# EAGLE board CT_schematic (EAGLE 7.6.0)

Size 100 x 80 mm. Coordinates in mm from the lower left corner, seen from the top.
Outline: 0,0 100,0 100,80 0,80 0,0
Copper layers (1*16): Top 0.035mm / dielectric 1.5mm / Bottom 0.035mm
Design rules "default": minimum track width 10mil, minimum drill 24mil, track to track 8mil, track to pad 8mil, pad to pad 8mil, via to via 8mil, smd to smd 8mil, copper to edge 40mil, drill to drill 8mil, minimum pad ring 10mil, minimum via ring 8mil, stop-mask expansion 4mil, vias tented up to drill 0mil, thermal gap 10mil

## Footprints (pad centres in the part's own frame; a part is rotated, then mirrored left to right if it is on the bottom)
C0603 = smd 0.8 x 0.8: 1 -0.762,0; 2 0.762,0
C0402 = smd 0.5 x 0.5: 1 -0.508,0; 2 0.508,0
C0805 = smd 1.2 x 1.3: 1 -1.016,0; 2 1.016,0
C1210 = smd 1.2 x 2.5: 1 -1.524,0; 2 1.524,0
C1206 = smd 1.3 x 1.6: 1 -1.524,0; 2 1.524,0
R0603 = smd 0.8 x 0.8: 1 -0.762,0; 2 0.762,0
EXV-9H = smd 3.505 x 1.676: 1 -2.857,0; 2 2.857,0
L0603 = smd 0.8 x 0.8: 1 -0.762,0; 2 0.762,0
L1210 = smd 1.2 x 2.5: 1 -1.524,0; 2 1.524,0
DR1040 = smd 1.6 x 3.2: 1 -4.458,0; 2 4.458,0
PJ-037B_PACKAGE = drill 3.7 square: 1 12,0 | drill 3.2 square: 2 6,0
TFBGA216 = smd 0.4 x 0.4: A1 -5.6,5.6; A2 -4.8,5.6; A3 -4,5.6; A4 -3.2,5.6; A5 -2.4,5.6; A6 -1.6,5.6; A7 -0.8,5.6; A8 0,5.6; A9 0.8,5.6; A10 1.6,5.6; A11 2.4,5.6; A12 3.2,5.6; A13 4,5.6; A14 4.8,5.6; A15 5.6,5.6; B1 -5.6,4.8; B2 -4.8,4.8; B3 -4,4.8; B4 -3.2,4.8; B5 -2.4,4.8; B6 -1.6,4.8; B7 -0.8,4.8; B8 0,4.8; B9 0.8,4.8; B10 1.6,4.8; B11 2.4,4.8; B12 3.2,4.8; B13 4,4.8; B14 4.8,4.8; B15 5.6,4.8; C1 -5.6,4; C2 -4.8,4; C3 -4,4; C4 -3.2,4; C5 -2.4,4; C6 -1.6,4; C7 -0.8,4; C8 0,4; C9 0.8,4; C10 1.6,4; C11 2.4,4; C12 3.2,4; C13 4,4; C14 4.8,4; C15 5.6,4; D1 -5.6,3.2; D2 -4.8,3.2; D3 -4,3.2; D4 -3.2,3.2; D5 -2.4,3.2; D6 -1.6,3.2; D7 -0.8,3.2; D8 0,3.2; D9 0.8,3.2; D10 1.6,3.2; D11 2.4,3.2; D12 3.2,3.2; D13 4,3.2; D14 4.8,3.2; D15 5.6,3.2; E1 -5.6,2.4; E2 -4.8,2.4; E3 -4,2.4; E4 -3.2,2.4; E5 -2.4,2.4; E6 -1.6,2.4; E7 -0.8,2.4; E8 0,2.4; E9 0.8,2.4; E10 1.6,2.4; E11 2.4,2.4; E12 3.2,2.4; E13 4,2.4; E14 4.8,2.4; E15 5.6,2.4; F1 -5.6,1.6; F2 -4.8,1.6; F3 -4,1.6; F4 -3.2,1.6; F5 -2.4,1.6; F6 -1.6,1.6; F7 -0.8,1.6; F8 0,1.6; F9 0.8,1.6; F10 1.6,1.6; F11 2.4,1.6; F12 3.2,1.6; F13 4,1.6; F14 4.8,1.6; F15 5.6,1.6; G1 -5.6,0.8; G2 -4.8,0.8; G3 -4,0.8; G4 -3.2,0.8; G5 -2.4,0.8; G6 -1.6,0.8; G10 1.6,0.8; G11 2.4,0.8; G12 3.2,0.8; G13 4,0.8; G14 4.8,0.8; G15 5.6,0.8; H1 -5.6,0; H2 -4.8,0; H3 -4,0; H4 -3.2,0; H5 -2.4,0; H6 -1.6,0; H10 1.6,0; H11 2.4,0; H12 3.2,0; H13 4,0; H14 4.8,0; H15 5.6,0; J1 -5.6,-0.8; J2 -4.8,-0.8; J3 -4,-0.8; J4 -3.2,-0.8; J5 -2.4,-0.8; J6 -1.6,-0.8; J10 1.6,-0.8; J11 2.4,-0.8; J12 3.2,-0.8; J13 4,-0.8; J14 4.8,-0.8; J15 5.6,-0.8; K1 -5.6,-1.6; K2 -4.8,-1.6; K3 -4,-1.6; K4 -3.2,-1.6; K5 -2.4,-1.6; K6 -1.6,-1.6; K7 -0.8,-1.6; K8 0,-1.6; K9 0.8,-1.6; K10 1.6,-1.6; K11 2.4,-1.6; K12 3.2,-1.6; K13 4,-1.6; K14 4.8,-1.6; K15 5.6,-1.6; L1 -5.6,-2.4; L2 -4.8,-2.4; L3 -4,-2.4; L4 -3.2,-2.4; L5 -2.4,-2.4; L6 -1.6,-2.4; L7 -0.8,-2.4; L8 0,-2.4; L9 0.8,-2.4; L10 1.6,-2.4; L11 2.4,-2.4; L12 3.2,-2.4; L13 4,-2.4; L14 4.8,-2.4; L15 5.6,-2.4; M1 -5.6,-3.2; M2 -4.8,-3.2; M3 -4,-3.2; M4 -3.2,-3.2; M5 -2.4,-3.2; M6 -1.6,-3.2; M7 -0.8,-3.2; M8 0,-3.2; M9 0.8,-3.2; M10 1.6,-3.2; M11 2.4,-3.2; M12 3.2,-3.2; M13 4,-3.2; M14 4.8,-3.2; M15 5.6,-3.2; N1 -5.6,-4; N2 -4.8,-4; N3 -4,-4; N4 -3.2,-4; N5 -2.4,-4; N6 -1.6,-4; N7 -0.8,-4; N8 0,-4; N9 0.8,-4; N10 1.6,-4; N11 2.4,-4; N12 3.2,-4; N13 4,-4; N14 4.8,-4; N15 5.6,-4; P1 -5.6,-4.8; P2 -4.8,-4.8; P3 -4,-4.8; P4 -3.2,-4.8; P5 -2.4,-4.8; P6 -1.6,-4.8; P7 -0.8,-4.8; P8 0,-4.8; P9 0.8,-4.8; P10 1.6,-4.8; P11 2.4,-4.8; P12 3.2,-4.8; P13 4,-4.8; P14 4.8,-4.8; P15 5.6,-4.8; R1 -5.6,-5.6; R2 -4.8,-5.6; R3 -4,-5.6; R4 -3.2,-5.6; R5 -2.4,-5.6; R6 -1.6,-5.6; R7 -0.8,-5.6; R8 0,-5.6; R9 0.8,-5.6; R10 1.6,-5.6; R11 2.4,-5.6; R12 3.2,-5.6; R13 4,-5.6; R14 4.8,-5.6; R15 5.6,-5.6
ARDUCAM = drill 1 pad 1.8 square: 1 0,0 | drill 1 pad 1.8: 2 0,2.54; 3 2.54,0; 4 2.54,2.54; 5 5.08,0; 6 5.08,2.54; 7 7.62,0; 8 7.62,2.54; 9 10.16,0; 10 10.16,2.54; 11 12.7,0; 12 12.7,2.54; 13 15.24,0; 14 15.24,2.54; 15 17.78,0; 16 17.78,2.54; 17 20.32,0; 18 20.32,2.54; 19 22.86,0; 20 22.86,2.54
TQFP64_10X10MC = smd 1.473 x 0.279: 1 -5.613,3.75; 2 -5.613,3.25; 3 -5.613,2.75; 4 -5.613,2.25; 5 -5.613,1.75; 6 -5.613,1.25; 7 -5.613,0.75; 8 -5.613,0.25; 9 -5.613,-0.25; 10 -5.613,-0.75; 11 -5.613,-1.25; 12 -5.613,-1.75; 13 -5.613,-2.25; 14 -5.613,-2.75; 15 -5.613,-3.25; 16 -5.613,-3.75; 33 5.613,-3.75; 34 5.613,-3.25; 35 5.613,-2.75; 36 5.613,-2.25; 37 5.613,-1.75; 38 5.613,-1.25; 39 5.613,-0.75; 40 5.613,-0.25; 41 5.613,0.25; 42 5.613,0.75; 43 5.613,1.25; 44 5.613,1.75; 45 5.613,2.25; 46 5.613,2.75; 47 5.613,3.25; 48 5.613,3.75 | smd 0.279 x 1.473: 17 -3.75,-5.613; 18 -3.25,-5.613; 19 -2.75,-5.613; 20 -2.25,-5.613; 21 -1.75,-5.613; 22 -1.25,-5.613; 23 -0.75,-5.613; 24 -0.25,-5.613; 25 0.25,-5.613; 26 0.75,-5.613; 27 1.25,-5.613; 28 1.75,-5.613; 29 2.25,-5.613; 30 2.75,-5.613; 31 3.25,-5.613; 32 3.75,-5.613; 49 3.75,5.613; 50 3.25,5.613; 51 2.75,5.613; 52 2.25,5.613; 53 1.75,5.613; 54 1.25,5.613; 55 0.75,5.613; 56 0.25,5.613; 57 -0.25,5.613; 58 -0.75,5.613; 59 -1.25,5.613; 60 -1.75,5.613; 61 -2.25,5.613; 62 -2.75,5.613; 63 -3.25,5.613; 64 -3.75,5.613
7498011122R = smd 0.71 x 2.29: 1 -3.545,-3.18; 2 -2.525,-3.18; 3 -1.505,-3.18; 4 -0.485,-3.18; 5 0.535,-3.18; 6 1.555,-3.18; 8 3.595,-3.18; 9 5.635,-3.18; 10 6.655,-3.18; 11 -6.605,-3.18; 12 -5.585,-3.18 | smd 1.4 x 2.54: 13 -8.51,10.2; 14 8.51,10.2 | hole 1.4: -3.5,0; 3.5,0
TST-110-05-T-D-RA = drill 1 pad 1.7 square: 1 0,0 | drill 1 pad 1.7: 2 0,2.54; 3 2.54,0; 4 2.54,2.54; 5 5.08,0; 6 5.08,2.54; 7 7.62,0; 8 7.62,2.54; 9 10.16,0; 10 10.16,2.54; 11 12.7,0; 12 12.7,2.54; 13 15.24,0; 14 15.24,2.54; 15 17.78,0; 16 17.78,2.54; 17 20.32,0; 18 20.32,2.54; 19 22.86,0; 20 22.86,2.54
SSOP-16 = smd 1.981 x 0.356: 1 -2.464,2.223; 2 -2.464,1.587; 3 -2.464,0.953; 4 -2.464,0.318; 5 -2.464,-0.318; 6 -2.464,-0.953; 7 -2.464,-1.587; 8 -2.464,-2.223; 9 2.464,-2.223; 10 2.464,-1.587; 11 2.464,-0.953; 12 2.464,-0.318; 13 2.464,0.318; 14 2.464,0.953; 15 2.464,1.587; 16 2.464,2.223
HTSS-105-01-G-D = drill 1 pad 1.8 square: 1 0,0 | drill 1 pad 1.8: 2 0,2.54; 3 2.54,0; 4 2.54,2.54; 5 5.08,0; 6 5.08,2.54; 7 7.62,0; 8 7.62,2.54; 9 10.16,0; 10 10.16,2.54
S29VS256RABBHW000 = smd 0.3 x 0.3: A1 -6,3; A14 0.5,3; C3 -5,2; C4 -4.5,2; C5 -4,2; C6 -3.5,2; C7 -3,2; C8 -2.5,2; C9 -2,2; C10 -1.5,2; C11 -1,2; C12 -0.5,2; D3 -5,1.5; D4 -4.5,1.5; D5 -4,1.5; D6 -3.5,1.5; D7 -3,1.5; D8 -2.5,1.5; D9 -2,1.5; D10 -1.5,1.5; D11 -1,1.5; D12 -0.5,1.5; E3 -5,1; E4 -4.5,1; E5 -4,1; E6 -3.5,1; E7 -3,1; E8 -2.5,1; E9 -2,1; E10 -1.5,1; E11 -1,1; E12 -0.5,1; F3 -5,0.5; F4 -4.5,0.5; F5 -4,0.5; F6 -3.5,0.5; F7 -3,0.5; F8 -2.5,0.5; F9 -2,0.5; F10 -1.5,0.5; F11 -1,0.5; F12 -0.5,0.5; H1 -6,-0.5; H14 0.5,-0.5
SOIC-8 = smd 1.6 x 0.6: 1 -2.7,1.905 | smd 1.55 x 0.6: 2 -2.7,0.635; 3 -2.7,-0.635; 4 -2.7,-1.905; 5 2.7,-1.905; 6 2.7,-0.635; 7 2.7,0.635; 8 2.7,1.905
182-009-MALE = drill 1.194 pad 1.524 octagon: 1 -5.537,10.923; 2 -2.769,10.923; 3 0,10.923; 4 2.769,10.923; 5 5.537,10.923; 6 -4.153,8.08; 7 -1.384,8.08; 8 1.384,8.08; 9 4.153,8.08 | hole 3.048: -12.446,9.501; 12.446,9.501
ABS07-32.768KHZ-7-T = smd 1.1 x 2.4: 1 -2.5,0; 2 0,0
ABLS-25.000MHZ-B2F-T = smd 5.6 x 2.8: 1 -3.81,0; 2 5.69,0
ASFL1 = smd 1.7 x 1.5: 1 -1.27,-1.1; 2 1.27,-1.1; 3 1.27,1.1; 4 -1.27,1.1
IDT74FCT38072 = smd 0.51 x 1: 1 0,0; 2 1.27,0; 3 2.54,0; 4 3.81,0; 5 3.81,4.95; 6 2.54,4.95; 7 1.27,4.95; 8 0,4.95
WSON-8 = smd 0.3 x 0.6: 1 -0.75,0; 2 0.05,0; 3 0.85,0; 4 1.65,0; 5 1.65,3.8; 6 0.85,3.8; 7 0.05,3.8; 8 -0.75,3.8 | smd 3 x 2.6: PAD 0.45,1.9
HTSSOP14 = smd 1.676 x 0.356: 1 -2.8,1.95; 2 -2.8,1.3; 3 -2.8,0.65; 4 -2.8,0; 5 -2.8,-0.65; 6 -2.8,-1.3; 7 -2.8,-1.95; 8 2.8,-1.95; 9 2.8,-1.3; 10 2.8,-0.65; 11 2.8,0; 12 2.8,0.65; 13 2.8,1.3; 14 2.8,1.95 | smd 3 x 5: 15 0,0 | drill 0.4 pad 0.45: P$1 -0.75,1.5; P$2 0.75,1.5; P$3 -0.75,0; P$4 0.8,0; P$5 -0.75,-1.5; P$6 0.9,-1.5
QFN-38_UHF = smd 0.75 x 0.3: 1 -2.4,2.75; 2 -2.4,2.25; 3 -2.4,1.75; 4 -2.4,1.25; 6 -2.4,0.25; 7 -2.4,-0.25; 8 -2.4,-0.75; 9 -2.4,-1.25; 10 -2.4,-1.75; 11 -2.4,-2.25; 12 -2.4,-2.75; 20 2.4,-2.75; 21 2.4,-2.25; 22 2.4,-1.75; 23 2.4,-1.25; 24 2.4,-0.75; 25 2.4,-0.25; 26 2.4,0.25; 27 2.4,0.75; 28 2.4,1.25; 29 2.4,1.75; 30 2.4,2.25; 31 2.4,2.75 | smd 0.758 x 0.3: 5 -2.4,0.75 | smd 0.3 x 0.75: 13 -1.5,-3.4; 14 -1,-3.4; 15 -0.5,-3.4; 16 0,-3.4; 17 0.5,-3.4; 18 1,-3.4; 19 1.5,-3.4; 32 1.5,3.4; 33 1,3.4; 34 0.5,3.4; 35 0,3.4; 36 -0.5,3.4; 37 -1,3.4; 38 -1.5,3.4 | smd 3.2 x 5.2: 39 0,0
IRF8306MTRPBF = smd 0.9 x 1.85: 1 0,0; 2 0,-2.35; 6 6.4,0; 7 6.4,-2.35 | smd 0.75 x 0.75: 3 1.75,-1.175 | smd 1.45 x 0.87: 4 3.5,-0.565; 5 3.5,-1.785
PW0020A = smd 1.35 x 0.35: 1 -2.85,2.925; 2 -2.85,2.275; 3 -2.85,1.625; 4 -2.85,0.975; 5 -2.85,0.325; 6 -2.85,-0.325; 7 -2.85,-0.975; 8 -2.85,-1.625; 9 -2.85,-2.275; 10 -2.85,-2.925; 11 2.85,-2.925; 12 2.85,-2.275; 13 2.85,-1.625; 14 2.85,-0.975; 15 2.85,-0.325; 16 2.85,0.325; 17 2.85,0.975; 18 2.85,1.625; 19 2.85,2.275; 20 2.85,2.925
DCU0008A_N = smd 0.5 x 0.3: 1 -1.6,0.75; 2 -1.6,0.25; 3 -1.6,-0.25; 4 -1.6,-0.75; 5 1.6,-0.75; 6 1.6,-0.25; 7 1.6,0.25; 8 1.6,0.75
SW_4-1437565-2 = smd 1.4 x 2.1: 1 -2.23,4.55; 2 -2.23,-4.55; 3 2.23,4.55; 4 2.23,-4.55
LGM67K-G1J2-24-Z = smd 0.8 x 1.4: A -2,0; C 0,0
NC7SZ125M5X = smd 1.3 x 0.7: 1 -1.3,0.95; 2 -1.3,0; 3 -1.3,-0.95; 4 1.3,-0.95; 5 1.3,0.95

## Placement (x,y rotation side)
C1  1e-06  [C0603]  -66.04,97.79 0 top  (outside the outline)
C2  1e-07  [C0603]  -69.85,97.79 0 top  (outside the outline)
C3  1e-07  [C0603]  -73.66,97.79 0 top  (outside the outline)
C4  1e-07  [C0603]  -77.47,97.79 0 top  (outside the outline)
C5  1e-07  [C0603]  -81.28,97.79 0 top  (outside the outline)
C6  1e-07  [C0603]  -85.09,97.79 0 top  (outside the outline)
C7  1e-07  [C0603]  -88.9,97.79 0 top  (outside the outline)
C8  1e-07  [C0603]  -92.71,97.79 0 top  (outside the outline)
C9  1e-07  [C0603]  -96.52,97.79 0 top  (outside the outline)
C10  1e-07  [C0603]  -100.33,97.79 0 top  (outside the outline)
C11  1e-07  [C0603]  -104.14,97.79 0 top  (outside the outline)
C12  1e-07  [C0603]  -107.95,97.79 0 top  (outside the outline)
C13  1e-07  [C0603]  -15.24,102.87 0 top  (outside the outline)
C14  1e-07  [C0603]  -19.05,102.87 0 top  (outside the outline)
C15  1e-07  [C0603]  -22.86,102.87 0 top  (outside the outline)
C16  1e-07  [C0603]  -26.67,102.87 0 top  (outside the outline)
C17  1e-07  [C0603]  -30.48,102.87 0 top  (outside the outline)
C18  1e-07  [C0603]  -34.29,102.87 0 top  (outside the outline)
C19  1e-07  [C0603]  -38.1,102.87 0 top  (outside the outline)
C20  1e-07  [C0603]  -41.91,102.87 0 top  (outside the outline)
C21  1e-07  [C0603]  -45.72,102.87 0 top  (outside the outline)
C22  4.7e-06  [C0603]  -39.37,97.79 0 top  (outside the outline)
C23  1e-08  [C0603]  -49.53,102.87 0 top  (outside the outline)
C24  1e-06  [C0603]  -53.34,102.87 0 top  (outside the outline)
C25  1e-07  [C0603]  -57.15,102.87 0 top  (outside the outline)
C26  1e-07  [C0603]  -60.96,102.87 0 top  (outside the outline)
C27  1e-07  [C0603]  -64.77,102.87 0 top  (outside the outline)
C28  1e-07  [C0603]  -68.58,102.87 0 top  (outside the outline)
C29  1e-11  [C0402]  -81.28,107.95 0 top  (outside the outline)
C30  1e-11  [C0402]  -85.09,107.95 0 top  (outside the outline)
C31  1e-11  [C0402]  -88.9,107.95 0 top  (outside the outline)
C32  1e-11  [C0402]  -92.71,107.95 0 top  (outside the outline)
C33  1e-06  [C0603]  -72.39,102.87 0 top  (outside the outline)
C34  1.8e-08  [C0402]  -73.66,107.95 0 top  (outside the outline)
C35  2.2e-06  [C0603]  -43.18,97.79 0 top  (outside the outline)
C36  1e-07  [C0402]  -96.52,107.95 0 top  (outside the outline)
C37  1e-08  [C0402]  -100.33,107.95 0 top  (outside the outline)
C38  2.2e-06  [C0603]  -46.99,97.79 0 top  (outside the outline)
C39  1e-07  [C0402]  -104.14,107.95 0 top  (outside the outline)
C40  1e-08  [C0402]  -107.95,107.95 0 top  (outside the outline)
C41  1e-07  [C0402]  -15.24,113.03 0 top  (outside the outline)
C42  1e-07  [C0402]  -19.05,113.03 0 top  (outside the outline)
C43  1e-05  [C0805]  -78.74,81.28 0 top  (outside the outline)
C44  1e-07  [C0402]  -22.86,113.03 0 top  (outside the outline)
C45  1e-07  [C0402]  -26.67,113.03 0 top  (outside the outline)
C46  1e-07  [C0402]  -30.48,113.03 0 top  (outside the outline)
C47  1e-07  [C0402]  -34.29,113.03 0 top  (outside the outline)
C48  1e-06  [C0603]  -76.2,102.87 0 top  (outside the outline)
C49  1e-06  [C0603]  -80.01,102.87 0 top  (outside the outline)
C50  2.2e-07  [C0603]  -50.8,97.79 0 top  (outside the outline)
C51  1e-06  [C0603]  -83.82,102.87 0 top  (outside the outline)
C52  1e-06  [C0603]  -87.63,102.87 0 top  (outside the outline)
C53  1e-07  [C0402]  -38.1,113.03 0 top  (outside the outline)
C54  2.2e-06  [C0603]  -54.61,97.79 0 top  (outside the outline)
C55  1e-07  [C0402]  -41.91,113.03 0 top  (outside the outline)
C56  2.2e-06  [C0603]  -58.42,97.79 0 top  (outside the outline)
C57  1e-07  [C0402]  -45.72,113.03 0 top  (outside the outline)
C58  1e-08  [C0402]  -49.53,113.03 0 top  (outside the outline)
C59  1e-08  [C0402]  -53.34,113.03 0 top  (outside the outline)
C60  1e-08  [C0402]  -57.15,113.03 0 top  (outside the outline)
C61  1e-08  [C0402]  -60.96,113.03 0 top  (outside the outline)
C62  1e-05  [C1210]  -87.63,73.66 0 top  (outside the outline)
C63  1e-05  [C0805]  -83.82,81.28 0 top  (outside the outline)
C64  1e-06  [C0603]  -91.44,102.87 0 top  (outside the outline)
C65  3.3e-09  [C0402]  -77.47,107.95 0 top  (outside the outline)
C66  1e-07  [C0402]  -64.77,113.03 0 top  (outside the outline)
C67  2.2e-05  [C1210]  -93.98,73.66 0 top  (outside the outline)
C68  2.2e-05  [C1210]  -100.33,73.66 0 top  (outside the outline)
C69  1e-05  [C1206]  -35.56,81.28 0 top  (outside the outline)
C70  1e-05  [C1206]  -41.91,81.28 0 top  (outside the outline)
C71  1e-08  [C0402]  -68.58,113.03 0 top  (outside the outline)
C72  1e-05  [C1210]  -106.68,73.66 0 top  (outside the outline)
C73  1e-05  [C1210]  -16.51,81.28 0 top  (outside the outline)
C74  1e-08  [C0402]  -72.39,113.03 0 top  (outside the outline)
C75  1e-05  [C1210]  -22.86,81.28 0 top  (outside the outline)
C76  1e-05  [C0805]  -88.9,81.28 0 top  (outside the outline)
C77  1e-07  [C0402]  -76.2,113.03 0 top  (outside the outline)
C78  2.2e-06  [C0603]  -62.23,97.79 0 top  (outside the outline)
C79  2.45e-08  [R0603]  -57.15,87.63 0 top  (outside the outline)
C80  2.8258362168397e-09  [R0603]  -99.06,81.28 0 top  (outside the outline)
C81  7.105e-09  [R0603]  -16.51,87.63 0 top  (outside the outline)
C82  0.0001  [EXV-9H]  -72.39,66.04 0 top  (outside the outline)
C83  0.0001  [EXV-9H]  -83.82,66.04 0 top  (outside the outline)
C84  1e-08  [C0402]  -80.01,113.03 0 top  (outside the outline)
C85  1e-07  [C0402]  -83.82,113.03 0 top  (outside the outline)
C86  1e-08  [C0402]  -87.63,113.03 0 top  (outside the outline)
C87  1e-07  [C0402]  -91.44,113.03 0 top  (outside the outline)
C88  1e-08  [C0402]  -95.25,113.03 0 top  (outside the outline)
C89  1e-07  [C0402]  -99.06,113.03 0 top  (outside the outline)
C90  1e-08  [C0402]  -102.87,113.03 0 top  (outside the outline)
C91  1e-07  [C0402]  -106.68,113.03 0 top  (outside the outline)
C92  1e-08  [C0402]  -15.24,118.11 0 top  (outside the outline)
C93  1e-08  [C0402]  -19.05,118.11 0 top  (outside the outline)
C94  1e-08  [C0402]  -22.86,118.11 0 top  (outside the outline)
C95  1e-08  [C0402]  -26.67,118.11 0 top  (outside the outline)
C96  1e-08  [C0402]  -30.48,118.11 0 top  (outside the outline)
F1  240.0  [L0603]  -95.25,102.87 0 top  (outside the outline)
F2  510.0  [L0603]  -99.06,102.87 0 top  (outside the outline)
I1  1e-05  [L1210]  -29.21,81.28 0 top  (outside the outline)
I2  5.2e-06  [DR1040]  -62.23,34.29 0 top  (outside the outline)
J1  PJ-037B  [PJ-037B_PACKAGE]  -27.94,35.56 0 top  (outside the outline)
R2  1000.0  [R0603]  -102.87,102.87 0 top  (outside the outline)
R7  4700.0  [R0603]  -106.68,102.87 0 top  (outside the outline)
R8  4700.0  [R0603]  -15.24,107.95 0 top  (outside the outline)
R9  4700.0  [R0603]  -19.05,107.95 0 top  (outside the outline)
R10  4700.0  [R0603]  -22.86,107.95 0 top  (outside the outline)
R15  10000.0  [R0603]  -62.23,87.63 0 top  (outside the outline)
R16  10000.0  [R0603]  -67.31,87.63 0 top  (outside the outline)
R17  10000.0  [R0603]  -72.39,87.63 0 top  (outside the outline)
R18  0.1  [R0603]  -26.67,107.95 0 top  (outside the outline)
R19  0.1  [R0603]  -30.48,107.95 0 top  (outside the outline)
R20  200.0  [R0603]  -34.29,107.95 0 top  (outside the outline)
R21  200.0  [R0603]  -38.1,107.95 0 top  (outside the outline)
R22  10000.0  [R0603]  -77.47,87.63 0 top  (outside the outline)
R23  10000.0  [R0603]  -82.55,87.63 0 top  (outside the outline)
R24  10000.0  [R0603]  -87.63,87.63 0 top  (outside the outline)
R25  1270.0  [R0603]  -41.91,107.95 0 top  (outside the outline)
R26  10000.0  [R0603]  -92.71,87.63 0 top  (outside the outline)
R27  10000.0  [R0603]  -97.79,87.63 0 top  (outside the outline)
R28  10000.0  [R0603]  -102.87,87.63 0 top  (outside the outline)
R29  10000.0  [R0603]  -107.95,87.63 0 top  (outside the outline)
R30  10000.0  [R0603]  -15.24,92.71 0 top  (outside the outline)
R31  10000.0  [R0603]  -20.32,92.71 0 top  (outside the outline)
R32  10000.0  [R0603]  -25.4,92.71 0 top  (outside the outline)
R33  10000.0  [R0603]  -30.48,92.71 0 top  (outside the outline)
R34  10000.0  [R0603]  -35.56,92.71 0 top  (outside the outline)
R35  10000.0  [R0603]  -40.64,92.71 0 top  (outside the outline)
R36  10000.0  [R0603]  -45.72,92.71 0 top  (outside the outline)
R37  10000.0  [R0603]  -50.8,92.71 0 top  (outside the outline)
R38  10000.0  [R0603]  -55.88,92.71 0 top  (outside the outline)
R39  100000.0  [R0603]  -21.59,87.63 0 top  (outside the outline)
R40  10000.0  [R0603]  -60.96,92.71 0 top  (outside the outline)
R41  10000.0  [R0603]  -66.04,92.71 0 top  (outside the outline)
R42  10000.0  [R0603]  -71.12,92.71 0 top  (outside the outline)
R43  10000.0  [R0603]  -76.2,92.71 0 top  (outside the outline)
R44  120.0  [R0603]  -45.72,107.95 0 top  (outside the outline)
R45  100000.0  [R0603]  -26.67,87.63 0 top  (outside the outline)
R46  100000.0  [R0603]  -31.75,87.63 0 top  (outside the outline)
R47  200.0  [R0603]  -49.53,107.95 0 top  (outside the outline)
R48  1000.0  [R0603]  -53.34,107.95 0 top  (outside the outline)
R49  30000.0  [R0603]  -81.28,92.71 0 top  (outside the outline)
R50  22000.0  [R0603]  -86.36,92.71 0 top  (outside the outline)
R51  100000.0  [R0603]  -36.83,87.63 0 top  (outside the outline)
R52  2231.0  [R0603]  -57.15,107.95 0 top  (outside the outline)
R53  1000.0  [R0603]  -60.96,107.95 0 top  (outside the outline)
R54  100000.0  [R0603]  -41.91,87.63 0 top  (outside the outline)
R55  200.0  [R0603]  -64.77,107.95 0 top  (outside the outline)
R56  1000.0  [R0603]  -68.58,107.95 0 top  (outside the outline)
R57  10000.0  [R0603]  -91.44,92.71 0 top  (outside the outline)
R58  75000.0  [R0603]  -96.52,92.71 0 top  (outside the outline)
R59  10000.0  [R0603]  -101.6,92.71 0 top  (outside the outline)
R60  10000.0  [R0603]  -106.68,92.71 0 top  (outside the outline)
R61  95300.0  [R0603]  -15.24,97.79 0 top  (outside the outline)
R62  95300.0  [R0603]  -20.32,97.79 0 top  (outside the outline)
R63  10000.0  [R0603]  -25.4,97.79 0 top  (outside the outline)
R64  10000.0  [R0603]  -30.48,97.79 0 top  (outside the outline)
R65  10000.0  [R0603]  -35.56,97.79 0 top  (outside the outline)
R66  122054.54545455  [R0603]  -106.68,81.28 0 top  (outside the outline)
R67  200000.0  [R0603]  -46.99,87.63 0 top  (outside the outline)
R68  200000.0  [R0603]  -52.07,87.63 0 top  (outside the outline)
U1  STM32F765NIH6  [TFBGA216]  -82.55,8.89 0 top  (outside the outline)
U2  arducam_ov2640  [ARDUCAM]  -59.69,72.39 0 top  (outside the outline)
U3  BCM5221KPT  [TQFP64_10X10MC]  -96.52,7.62 0 top  (outside the outline)
U4  7498011122R  [7498011122R]  -22.86,7.62 0 top  (outside the outline)
U5  TST-110-05-T-D-RA  [TST-110-05-T-D-RA]  -64.77,63.5 0 top  (outside the outline)
U6  LTC2804CGN-1#PBF  [SSOP-16]  -83.82,34.29 0 top  (outside the outline)
U7  HTSS-105-01-G-D  [HTSS-105-01-G-D]  -102.87,33.02 0 top  (outside the outline)
U8  S29VS256RABBHW000  [S29VS256RABBHW000]  -80.01,55.88 0 top  (outside the outline)
U9  SN65HVD230D  [SOIC-8]  -21.59,46.99 0 top  (outside the outline)
U10  182-009-113R531  [182-009-MALE]  -55.88,6.35 0 top  (outside the outline)
U11  ABS07-32.768KHZ-7-T  [ABS07-32.768KHZ-7-T]  -27.94,74.93 0 top  (outside the outline)
U12  ABLS-25.000MHZ-B2F-T  [ABLS-25.000MHZ-B2F-T]  -102.87,66.04 0 top  (outside the outline)
U13  ASFL1-25MHZ-NCS  [ASFL1]  -46.99,57.15 0 top  (outside the outline)
U14  ASFL1-50MHZ-NCS  [ASFL1]  -63.5,57.15 0 top  (outside the outline)
U15  idt74fct38072  [IDT74FCT38072]  -29.21,63.5 0 top  (outside the outline)
U16  LP3878SDX-ADJ/NOPB  [WSON-8]  -73.66,45.72 0 top  (outside the outline)
U17  tps54225PWP  [HTSSOP14]  -67.31,73.66 0 top  (outside the outline)
U18  LP3878SDX-ADJ/NOPB  [WSON-8]  -93.98,45.72 0 top  (outside the outline)
U19  LP3878SDX-ADJ/NOPB  [WSON-8]  -30.48,54.61 0 top  (outside the outline)
U20  LTC2928CUHF#PBF  [QFN-38_UHF]  -91.44,55.88 0 top  (outside the outline)
U21  IRF8306MTRPbF  [IRF8306MTRPBF]  -39.37,48.26 0 top  (outside the outline)
U22  IRF8306MTRPbF  [IRF8306MTRPBF]  -54.61,48.26 0 top  (outside the outline)
U23  LSF0108PWR  [PW0020A]  -33.02,38.1 0 top  (outside the outline)
U24  LSF0102DCTR  [DCU0008A_N]  -43.18,116.84 0 top  (outside the outline)
U25  4-1437565-2  [SW_4-1437565-2]  -52.07,34.29 0 top  (outside the outline)
U26  Q65110A2395  [LGM67K-G1J2-24-Z]  -76.2,73.66 0 top  (outside the outline)
U27  nc7sz125m5x  [NC7SZ125M5X]  -46.99,81.28 0 top  (outside the outline)
U28  nc7sz125m5x  [NC7SZ125M5X]  -53.34,81.28 0 top  (outside the outline)
U29  nc7sz125m5x  [NC7SZ125M5X]  -59.69,81.28 0 top  (outside the outline)
U30  nc7sz125m5x  [NC7SZ125M5X]  -66.04,81.28 0 top  (outside the outline)
U31  nc7sz125m5x  [NC7SZ125M5X]  -72.39,81.28 0 top  (outside the outline)

## Library data of the parts
C1-C96 F1 F2 I1 I2 J1 R2 R7-R10 R15-R68 U1-U31 = circuit_tree

## Nets
CLK_CRYSTAL_U1_E1: C29.1 U1.E1 U11.1
CLK_CRYSTAL_U1_F1: C30.1 U1.F1 U11.2
CLK_CRYSTAL_U1_G1: C31.1 U1.G1 U12.1
CLK_CRYSTAL_U1_H1: C32.1 U1.H1 U12.2
CLK_U1_N2: U1.N2 U15.7
CLK_U2_8: U2.8 U13.3
CLK_U3_4: U3.4 U15.6
CLK_U15_3: U14.3 U15.3
GND: C1.2 C2.2 C3.2 C4.2 C5.2 C6.2 C7.2 C8.2 C9.2 C10.2 C11.2 C12.2 C13.2 C14.2 C15.2 C16.2 C17.2 C18.2 C19.2 C20.2 C21.2 C22.2 C23.2 C24.2 C25.2 C26.2 C27.2 C28.2 C29.2 C30.2 C31.2 C32.2 C33.2 C34.2 C35.2 C36.2 C37.2 C38.2 C39.2 C40.2 C41.2 C42.2 C43.2 C44.2 C45.2 C46.2 C47.2 C48.2 C49.2 C51.2 C52.2 C53.2 C54.2 C55.2 C56.2 C57.2 C58.2 C59.2 C60.2 C61.2 C62.2 C63.2 C64.2 C65.2 C67.2 C68.2 C69.2 C70.2 C71.2 C72.2 C73.2 C74.2 C75.2 C76.2 C77.2 C78.2 C79.2 C80.2 C81.2 C82.2 C83.2 C84.2 C85.2 C86.2 C87.2 C88.2 C89.2 C90.2 C91.2 C92.2 C93.2 C94.2 C95.2 C96.2 J1.2 R2.2 R15.2 R18.2 R19.2 R22.2 R24.2 R25.2 R26.2 R28.2 R29.2 R30.2 R31.2 R32.2 R38.2 R45.2 R48.2 R50.2 R53.2 R56.2 R58.2 R61.2 R62.2 R63.2 R64.2 R65.2 U1.F2 U1.F6 U1.F7 U1.F8 U1.F9 U1.F10 U1.G6 U1.G10 U1.H6 U1.H10 U1.J6 U1.J10 U1.K6 U1.K7 U1.K8 U1.K9 U1.K10 U1.L6 U1.M1 U1.N1 U2.2 U2.20 U3.6 U3.7 U3.24 U3.29 U3.32 U3.40 U3.45 U3.54 U3.63 U4.10 U4.12 U5.4 U5.6 U5.8 U5.10 U5.12 U5.14 U5.16 U5.18 U5.20 U6.8 U7.9 U8.C5 U8.D12 U8.E3 U8.F5 U9.2 U10.5 U13.2 U14.2 U15.4 U15.5 U15.8 U16.3 U16.PAD U17.5 U17.8 U17.9 U17.15 U18.3 U18.PAD U19.3 U19.PAD U20.8 U20.9 U20.10 U20.12 U20.13 U20.24 U20.25 U20.30 U20.32 U20.39 U23.1 U24.1 U26.C U27.2 U27.3 U28.1 U28.3 U29.1 U29.3 U30.1 U30.3 U31.1 U31.3
NET_U1_E5: R16.1 U1.E5
NET_U1_E6: R15.1 U1.E6
NET_U1_E11: C28.1 U1.E11
NET_U1_J1: R9.1 U1.J1 U30.4
NET_U1_L5: R17.1 U1.L5
NET_U1_M3: U23.4
NET_U1_P2: U23.3
NET_U1_R1: C23.1 C24.1 F1.1 U1.P1 U1.R1
NET_U1_R13: U26.A
NET_U1_R15: U25.3 U25.4
NET_U2_19: R10.1 U2.19 U31.4
NET_U3_2: C38.1 C39.1 C40.1 U3.2 U3.55
NET_U3_9: R7.1 U3.9 U28.4
NET_U3_10: R26.1 U3.10
NET_U3_11: R27.1 U3.11
NET_U3_12: R28.1 U3.12
NET_U3_13: R29.1 U3.13
NET_U3_14: R30.1 U3.14
NET_U3_16: R24.1 U3.16
NET_U3_18: R32.1 U3.18
NET_U3_20: U3.20
NET_U3_23: R25.1 U3.23
NET_U3_27: C35.1 C36.1 C37.1 U3.22 U3.27 U3.28
NET_U3_37: R31.1 U3.37
NET_U3_38: R22.1 U3.38
NET_U3_39: R23.1 U3.39
NET_U4_1: U3.31 U4.1
NET_U4_2: F2.2 U4.2
NET_U4_3: U3.30 U4.3
NET_U4_4: U3.26 U4.4
NET_U4_5: C34.1 F2.1 U4.2 U4.5
NET_U4_6: U3.25 U4.6
NET_U4_8: R19.1 U4.8
NET_U4_9: R20.1 U4.9
NET_U4_11: R21.1 U4.11
NET_U4_12: R20.2 U4.12
NET_U4_13: R18.1 U4.13 U4.14
NET_U4_35: R21.2
NET_U5_19: R38.1 U5.19
NET_U6_6: C48.1 U6.6
NET_U6_7: C50.1 I1.2 U6.7
NET_U6_9: C49.1 U6.9
NET_U6_10: C50.2 U6.10
NET_U6_11: R39.1 U6.11
NET_U7_3: U6.1 U7.3
NET_U7_4: U6.2 U7.4
NET_U7_5: U6.3 U7.5
NET_U7_6: U6.4 U7.6
NET_U8_C9: U8.C9
NET_U8_D8: R8.1 U8.D8 U29.4
NET_U9_6: R44.2 U9.6
NET_U9_8: R45.1 U9.8
NET_U10_2: R44.2 U9.6 U10.2
NET_U10_3: R44.1 U9.7 U10.3
NET_U16_1: C61.1 U16.1
NET_U16_6: R47.2 R48.1 U16.6
NET_U16_8: R46.1 U16.8
NET_U17_2: R49.2 R50.1 U17.2
NET_U17_3: C64.1 U17.3
NET_U17_4: C65.1 U17.4
NET_U17_10: C66.1 I2.1 U17.10 U17.11
NET_U17_12: C66.2 U17.12
NET_U18_1: C71.1 U18.1
NET_U18_6: R52.2 R53.1 U18.6
NET_U18_8: R51.1 U18.8
NET_U19_1: C74.1 U19.1
NET_U19_6: R55.2 R56.1 U19.6
NET_U19_8: R54.1 U19.8
NET_U20_3: R64.1 U20.3
NET_U20_6: R61.1 U20.6
NET_U20_7: R62.1 U20.7
NET_U20_16: R63.1 R66.1 U20.16
NET_U20_18: R60.1 U20.18
NET_U20_19: R59.1 U20.19 U20.20
NET_U20_21: R57.1 R58.1 U20.21 U27.4 U28.2 U29.2 U30.2 U31.2
NET_U20_22: C77.1 R57.2 R59.2 R60.2 U20.11 U20.22
NET_U20_26: C80.1 U20.26
NET_U20_27: C79.1 U20.27
NET_U20_28: C81.1 U20.28
NET_U20_38: R65.1 U20.38
NET_U21_3: U20.2 U21.3
NET_U22_3: U20.37 U22.3
NET_U23_20: R67.1 U23.20
NET_U24_8: R68.1 U24.8
NET_U25_1: R2.1 U25.1 U25.2
PROC_CAN1_RX_TOIOBUF: U24.4
PROC_CAN1_RX_TOXCVR: U9.4 U24.5
PROC_CAN1_TX_TOIOBUF: U24.3
PROC_CAN1_TX_TOXCVR: U9.1 U24.6
PROC_ETH_CRS_DV_TOIOBUF: U23.6
PROC_ETH_CRS_DV_TOXCVR: U3.62 U23.15
PROC_ETH_MDC_TOXCVR: U3.42 U23.17
PROC_ETH_MDIO_TOXCVR: U3.41 U23.18
PROC_ETH_RXD0_TOIOBUF: U23.8
PROC_ETH_RXD0_TOXCVR: U3.48 U23.13
PROC_ETH_RXD1_TOIOBUF: U23.10
PROC_ETH_RXD1_TOXCVR: U3.47 U23.11
PROC_ETH_TX_EN_TOIOBUF: U23.7
PROC_ETH_TX_EN_TOXCVR: U3.56 U23.14
PROC_ETH_TXD0_TOIOBUF: U23.9
PROC_ETH_TXD0_TOXCVR: U3.57 U23.12
PROC_ETH_TXD1_TOIOBUF: U23.5
PROC_ETH_TXD1_TOXCVR: U3.58 U23.16
PROC_FMC_A16: U1.N10 U8.D4
PROC_FMC_A17: U1.M10 U8.C11
PROC_FMC_A18: U1.M11 U8.D10
PROC_FMC_A19: U1.A2 U8.C10
PROC_FMC_A20: U1.A1 U8.D5
PROC_FMC_A21: U1.B1 U8.C4
PROC_FMC_A22: U1.B2 U8.C12
PROC_FMC_A23: U1.A3 U8.D7
PROC_FMC_CLK: U1.C11 U8.C6
PROC_FMC_D0: U1.L12 U8.F3
PROC_FMC_D1: U1.K13 U8.F4
PROC_FMC_D2: U1.B12 U8.E6
PROC_FMC_D3: U1.C12 U8.E7
PROC_FMC_D4: U1.R8 U8.F8
PROC_FMC_D5: U1.N9 U8.F9
PROC_FMC_D6: U1.P9 U8.E10
PROC_FMC_D7: U1.R9 U8.E11
PROC_FMC_D8: U1.P10 U8.E4
PROC_FMC_D9: U1.R10 U8.E5
PROC_FMC_D10: U1.R12 U8.F6
PROC_FMC_D11: U1.P11 U8.F7
PROC_FMC_D12: U1.R11 U8.E8
PROC_FMC_D13: U1.L15 U8.E9
PROC_FMC_D14: U1.L14 U8.F11
PROC_FMC_D15: U1.K15 U8.F12
PROC_FMC_NE2: R41.1 U1.D9 U8.D11
PROC_FMC_NL: U1.B5 U8.D6
PROC_FMC_NOE: R43.1 U1.D11 U8.E12
PROC_FMC_NWAIT: R40.1 U1.B11 U8.C3
PROC_FMC_NWE: R42.1 U1.C10 U8.C8
PROC_SYS_JTCK_SWCLK: R36.1 U1.A14 U5.9
PROC_SYS_JTDI: R34.1 U1.A13 U5.5
PROC_SYS_JTDO_SWO: U1.A10 U5.13
PROC_SYS_JTMS_SWDIO: R35.1 U1.A15 U5.7
PROC_SYS_JTRST: R33.1 U1.A9 U5.3
PROC_UART4_CTS: U1.R5 U6.13
PROC_UART4_RTS: U1.R14 U6.15
PROC_UART4_RX: U1.C15 U6.16
PROC_UART4_TX: U1.B14 U6.14
RST_OUT_U5_SRESET_B: R37.1 U5.15 U27.1
VCC_14V8: C78.1 C82.1 C83.1 J1.1 R66.2 U20.23 U21.1 U21.2 U21.6 U21.7 U22.1 U22.2 U22.6 U22.7
VCC_S1_14V8: C62.1 C69.1 C70.1 C72.1 R46.2 R51.2 U16.4 U17.7 U17.13 U17.14 U18.4 U21.4 U21.5
VCC_S2_14V8: C75.1 R54.2 U19.4 U22.4 U22.5
VCC_TIER1_1V2: C27.1 C63.1 R47.1 U1.L11 U16.5
VCC_TIER1_1V8: C1.1 C2.1 C3.1 C4.1 C5.1 C6.1 C7.1 C8.1 C9.1 C10.1 C11.1 C12.1 C13.1 C14.1 C15.1 C16.1 C17.1 C18.1 C19.1 C20.1 C21.1 C22.1 C26.1 C47.1 C51.1 C52.1 C53.1 C54.1 C55.1 C56.1 C67.1 C68.1 C86.1 C87.1 C90.1 C91.1 C92.1 C93.1 C94.1 C95.1 C96.1 F1.2 I1.1 I2.2 R8.2 R9.2 R16.2 R17.2 R33.2 R34.2 R35.2 R36.2 R37.2 R39.2 R40.2 R41.2 R42.2 R43.2 R49.1 U1.C1 U1.E7 U1.E8 U1.E9 U1.E10 U1.F4 U1.F5 U1.F11 U1.G5 U1.H5 U1.H11 U1.J5 U1.J11 U1.K5 U1.K11 U1.L7 U1.L8 U1.L9 U1.L10 U5.1 U6.5 U6.12 U8.C7 U8.D3 U8.F10 U17.1 U23.2 U24.2 U27.5 U28.5 U29.5 U30.5 U31.5
VCC_TIER1_3V3: C25.1 C33.1 C41.1 C42.1 C43.1 C44.1 C45.1 C46.1 C57.1 C58.1 C59.1 C60.1 C73.1 C84.1 C85.1 C88.1 C89.1 R7.2 R10.2 R23.2 R27.2 R52.1 R67.2 R68.2 U1.G11 U2.1 U3.1 U3.3 U3.46 U5.2 U9.3 U13.4 U14.4 U15.1 U15.2 U18.5 U23.19 U24.7
VCC_TIER2_1V2: C76.1 R55.1 U19.5

## Tracks (layer width: path | path; a pad name or v marks a point on that pad's centre or on a via)
CLK_CRYSTAL_U1_E1  (2 unrouted)
CLK_CRYSTAL_U1_F1  (2 unrouted)
CLK_CRYSTAL_U1_G1  (2 unrouted)
CLK_CRYSTAL_U1_H1  (2 unrouted)
CLK_U1_N2  (1 unrouted)
CLK_U2_8  (1 unrouted)
CLK_U3_4  (1 unrouted)
CLK_U15_3  (1 unrouted)
GND  (207 unrouted)
NET_U1_E5  (1 unrouted)
NET_U1_E6  (1 unrouted)
NET_U1_E11  (1 unrouted)
NET_U1_J1  (2 unrouted)
NET_U1_L5  (1 unrouted)
NET_U1_R1  (4 unrouted)
NET_U1_R15  (1 unrouted)
NET_U2_19  (2 unrouted)
NET_U3_2  (4 unrouted)
NET_U3_9  (2 unrouted)
NET_U3_10  (1 unrouted)
NET_U3_11  (1 unrouted)
NET_U3_12  (1 unrouted)
NET_U3_13  (1 unrouted)
NET_U3_14  (1 unrouted)
NET_U3_16  (1 unrouted)
NET_U3_18  (1 unrouted)
NET_U3_23  (1 unrouted)
NET_U3_27  (5 unrouted)
NET_U3_37  (1 unrouted)
NET_U3_38  (1 unrouted)
NET_U3_39  (1 unrouted)
NET_U4_1  (1 unrouted)
NET_U4_2  (1 unrouted)
NET_U4_3  (1 unrouted)
NET_U4_4  (1 unrouted)
NET_U4_5  (3 unrouted)
NET_U4_6  (1 unrouted)
NET_U4_8  (1 unrouted)
NET_U4_9  (1 unrouted)
NET_U4_11  (1 unrouted)
NET_U4_12  (1 unrouted)
NET_U4_13  (2 unrouted)
NET_U5_19  (1 unrouted)
NET_U6_6  (1 unrouted)
NET_U6_7  (2 unrouted)
NET_U6_9  (1 unrouted)
NET_U6_10  (1 unrouted)
NET_U6_11  (1 unrouted)
NET_U7_3  (1 unrouted)
NET_U7_4  (1 unrouted)
NET_U7_5  (1 unrouted)
NET_U7_6  (1 unrouted)
NET_U8_D8  (2 unrouted)
NET_U9_6  (1 unrouted)
NET_U9_8  (1 unrouted)
NET_U10_2  (2 unrouted)
NET_U10_3  (2 unrouted)
NET_U16_1  (1 unrouted)
NET_U16_6  (2 unrouted)
NET_U16_8  (1 unrouted)
NET_U17_2  (2 unrouted)
NET_U17_3  (1 unrouted)
NET_U17_4  (1 unrouted)
NET_U17_10  (3 unrouted)
NET_U17_12  (1 unrouted)
NET_U18_1  (1 unrouted)
NET_U18_6  (2 unrouted)
NET_U18_8  (1 unrouted)
NET_U19_1  (1 unrouted)
NET_U19_6  (2 unrouted)
NET_U19_8  (1 unrouted)
NET_U20_3  (1 unrouted)
NET_U20_6  (1 unrouted)
NET_U20_7  (1 unrouted)
NET_U20_16  (2 unrouted)
NET_U20_18  (1 unrouted)
NET_U20_19  (2 unrouted)
NET_U20_21  (7 unrouted)
NET_U20_22  (5 unrouted)
NET_U20_26  (1 unrouted)
NET_U20_27  (1 unrouted)
NET_U20_28  (1 unrouted)
NET_U20_38  (1 unrouted)
NET_U21_3  (1 unrouted)
NET_U22_3  (1 unrouted)
NET_U23_20  (1 unrouted)
NET_U24_8  (1 unrouted)
NET_U25_1  (2 unrouted)
PROC_CAN1_RX_TOXCVR  (1 unrouted)
PROC_CAN1_TX_TOXCVR  (1 unrouted)
PROC_ETH_CRS_DV_TOXCVR  (1 unrouted)
PROC_ETH_MDC_TOXCVR  (1 unrouted)
PROC_ETH_MDIO_TOXCVR  (1 unrouted)
PROC_ETH_RXD0_TOXCVR  (1 unrouted)
PROC_ETH_RXD1_TOXCVR  (1 unrouted)
PROC_ETH_TX_EN_TOXCVR  (1 unrouted)
PROC_ETH_TXD0_TOXCVR  (1 unrouted)
PROC_ETH_TXD1_TOXCVR  (1 unrouted)
PROC_FMC_A16  (1 unrouted)
PROC_FMC_A17  (1 unrouted)
PROC_FMC_A18  (1 unrouted)
PROC_FMC_A19  (1 unrouted)
PROC_FMC_A20  (1 unrouted)
PROC_FMC_A21  (1 unrouted)
PROC_FMC_A22  (1 unrouted)
PROC_FMC_A23  (1 unrouted)
PROC_FMC_CLK  (1 unrouted)
PROC_FMC_D0  (1 unrouted)
PROC_FMC_D1  (1 unrouted)
PROC_FMC_D2  (1 unrouted)
PROC_FMC_D3  (1 unrouted)
PROC_FMC_D4  (1 unrouted)
PROC_FMC_D5  (1 unrouted)
PROC_FMC_D6  (1 unrouted)
PROC_FMC_D7  (1 unrouted)
PROC_FMC_D8  (1 unrouted)
PROC_FMC_D9  (1 unrouted)
PROC_FMC_D10  (1 unrouted)
PROC_FMC_D11  (1 unrouted)
PROC_FMC_D12  (1 unrouted)
PROC_FMC_D13  (1 unrouted)
PROC_FMC_D14  (1 unrouted)
PROC_FMC_D15  (1 unrouted)
PROC_FMC_NE2  (2 unrouted)
PROC_FMC_NL  (1 unrouted)
PROC_FMC_NOE  (2 unrouted)
PROC_FMC_NWAIT  (2 unrouted)
PROC_FMC_NWE  (2 unrouted)
PROC_SYS_JTCK_SWCLK  (2 unrouted)
PROC_SYS_JTDI  (2 unrouted)
PROC_SYS_JTDO_SWO  (1 unrouted)
PROC_SYS_JTMS_SWDIO  (2 unrouted)
PROC_SYS_JTRST  (2 unrouted)
PROC_UART4_CTS  (1 unrouted)
PROC_UART4_RTS  (1 unrouted)
PROC_UART4_RX  (1 unrouted)
PROC_UART4_TX  (1 unrouted)
RST_OUT_U5_SRESET_B  (2 unrouted)
VCC_14V8  (13 unrouted)
VCC_S1_14V8  (12 unrouted)
VCC_S2_14V8  (4 unrouted)
VCC_TIER1_1V2  (4 unrouted)
VCC_TIER1_1V8  (91 unrouted)
VCC_TIER1_3V3  (37 unrouted)
VCC_TIER2_1V2  (2 unrouted)